# Altium PCB zynq_dev_V1.PcbDoc (part 1 of 2)
Units mil, origin at the board's own origin, x right, y up, seen from the top; angles counter-clockwise.
Board outline 6000 x 4000 mil, 9 copper layers (Component Side, Ground Plane 1 (GND), Inner Layer 1, Inner Layer 2, Power Plane (VCC), Inner Layer 3, Mid-Layer 4, Ground Plane 2 (GND), Solder Side), stack 82.902 mil thick; 303 components, 162 nets, 1398 pads, 550 vias.
Unrouted connection lines stored in the file: 7.
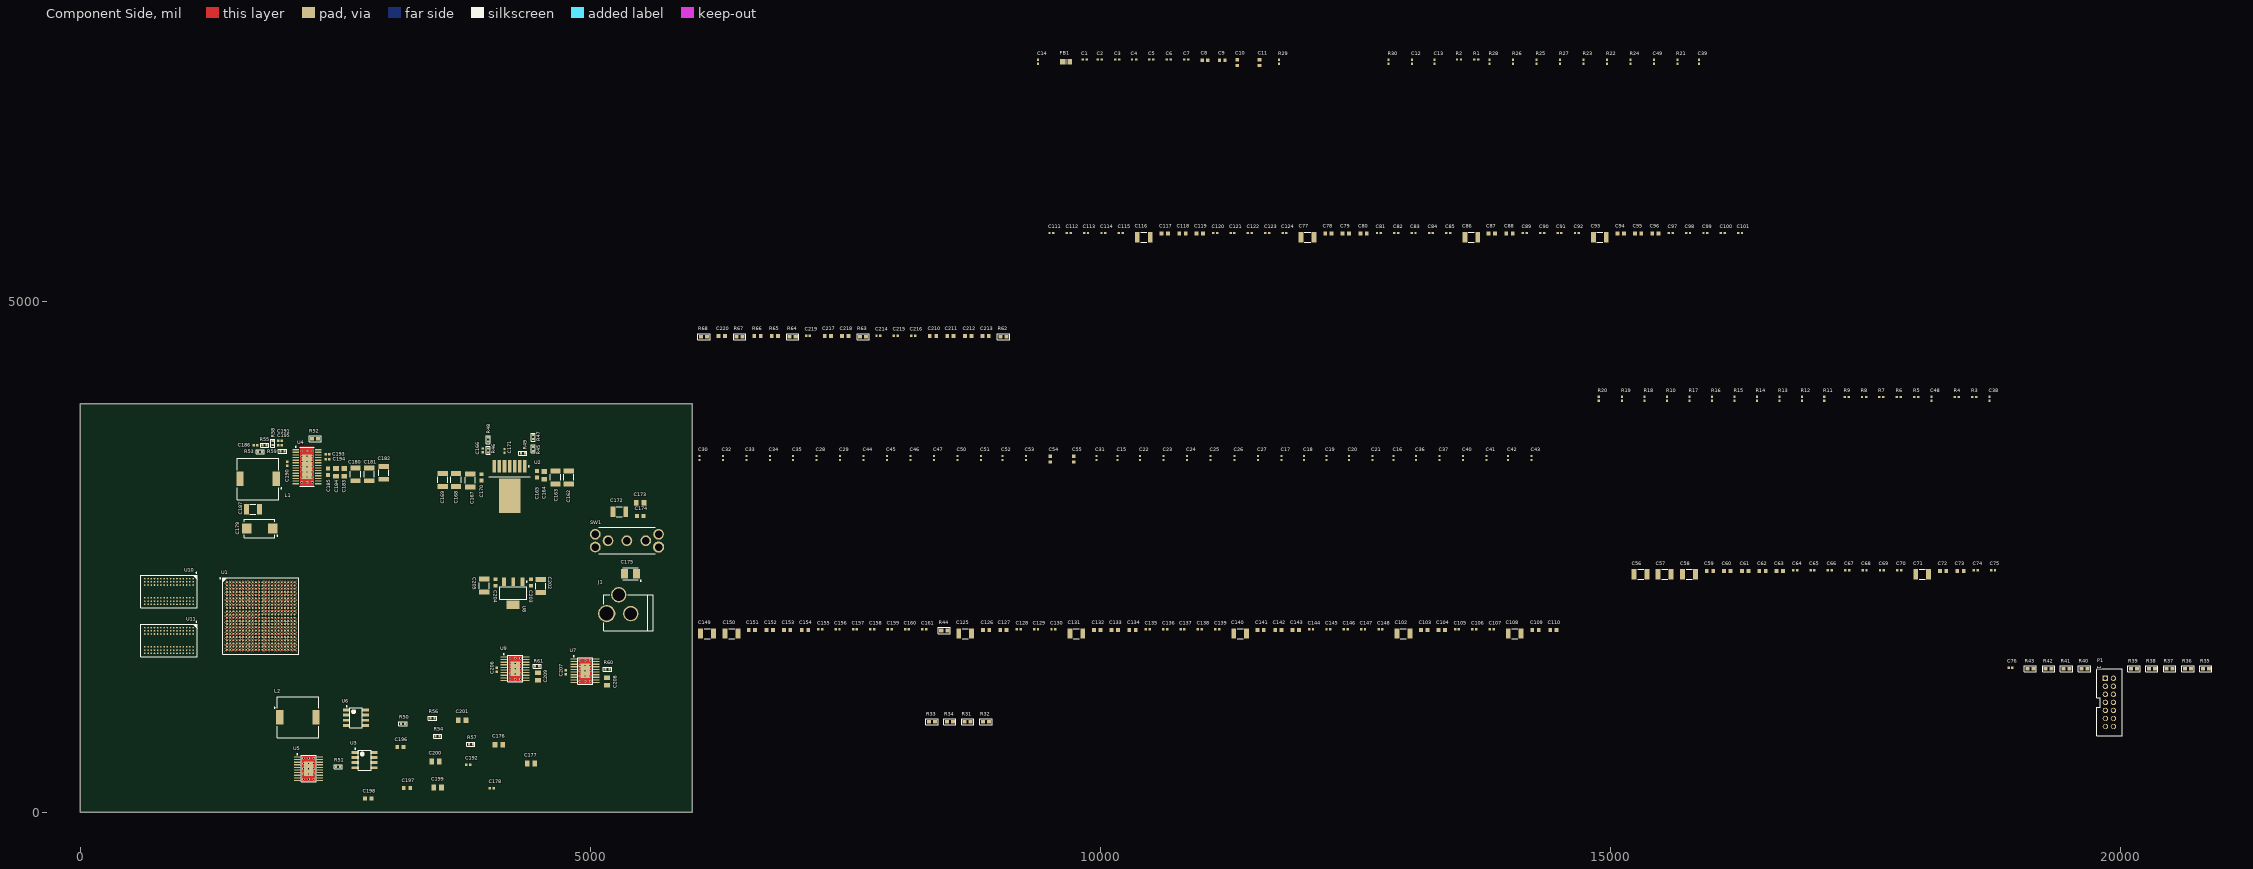
[diagram p0: Component Side view]
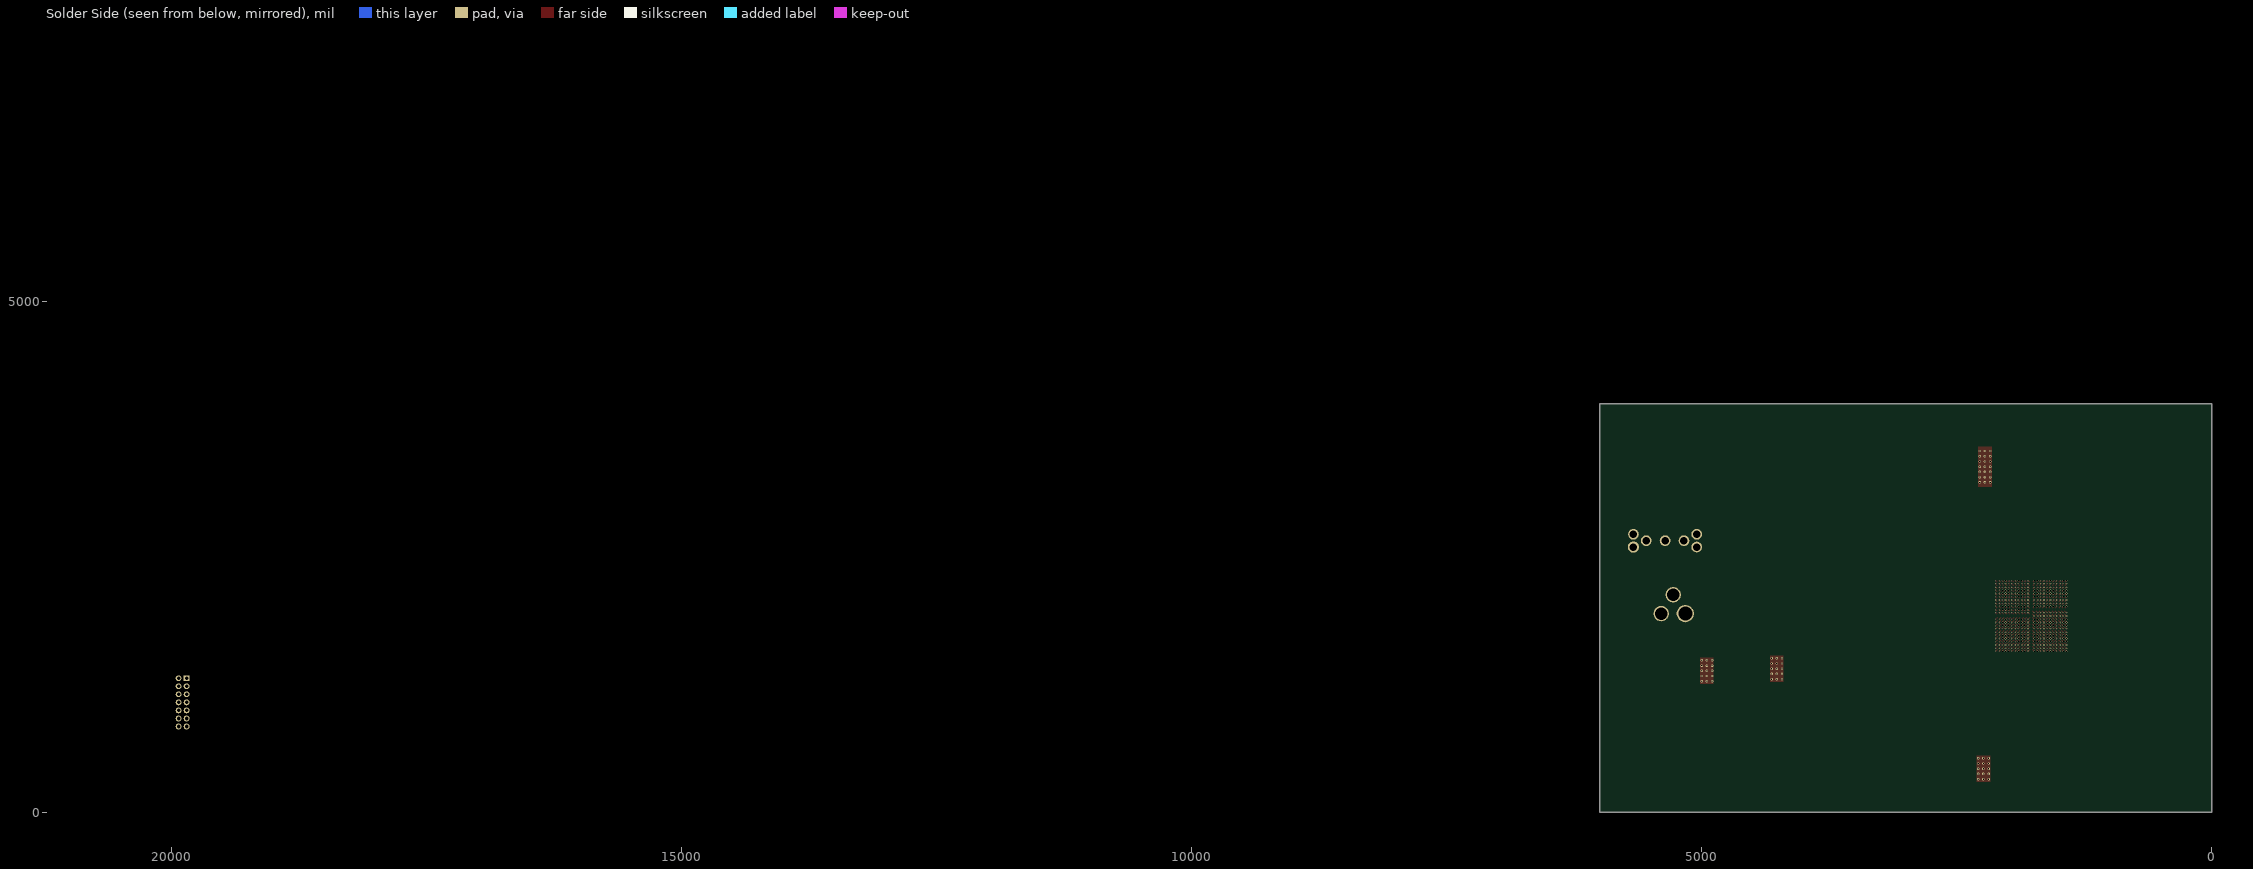
[diagram p1: Solder Side view, seen from below]
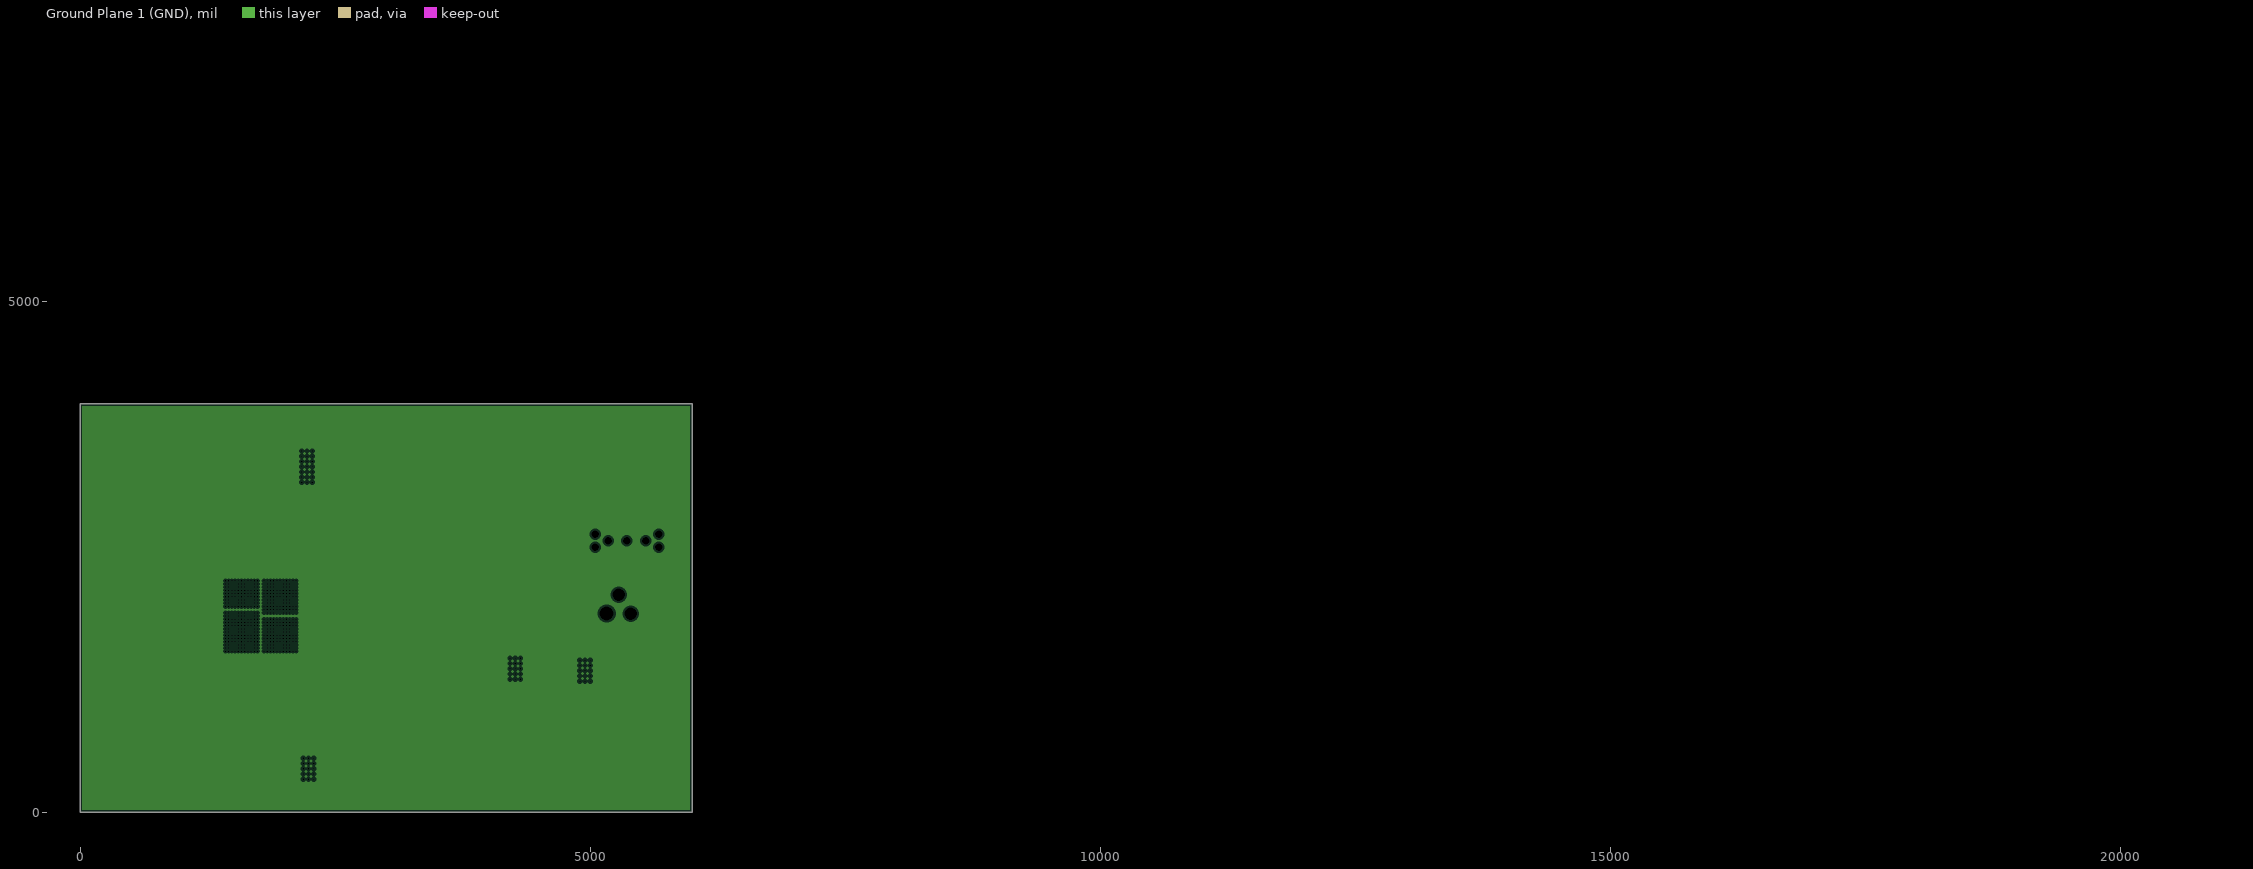
[diagram p2: Ground Plane 1 (GND), clearances drawn from the general rule]
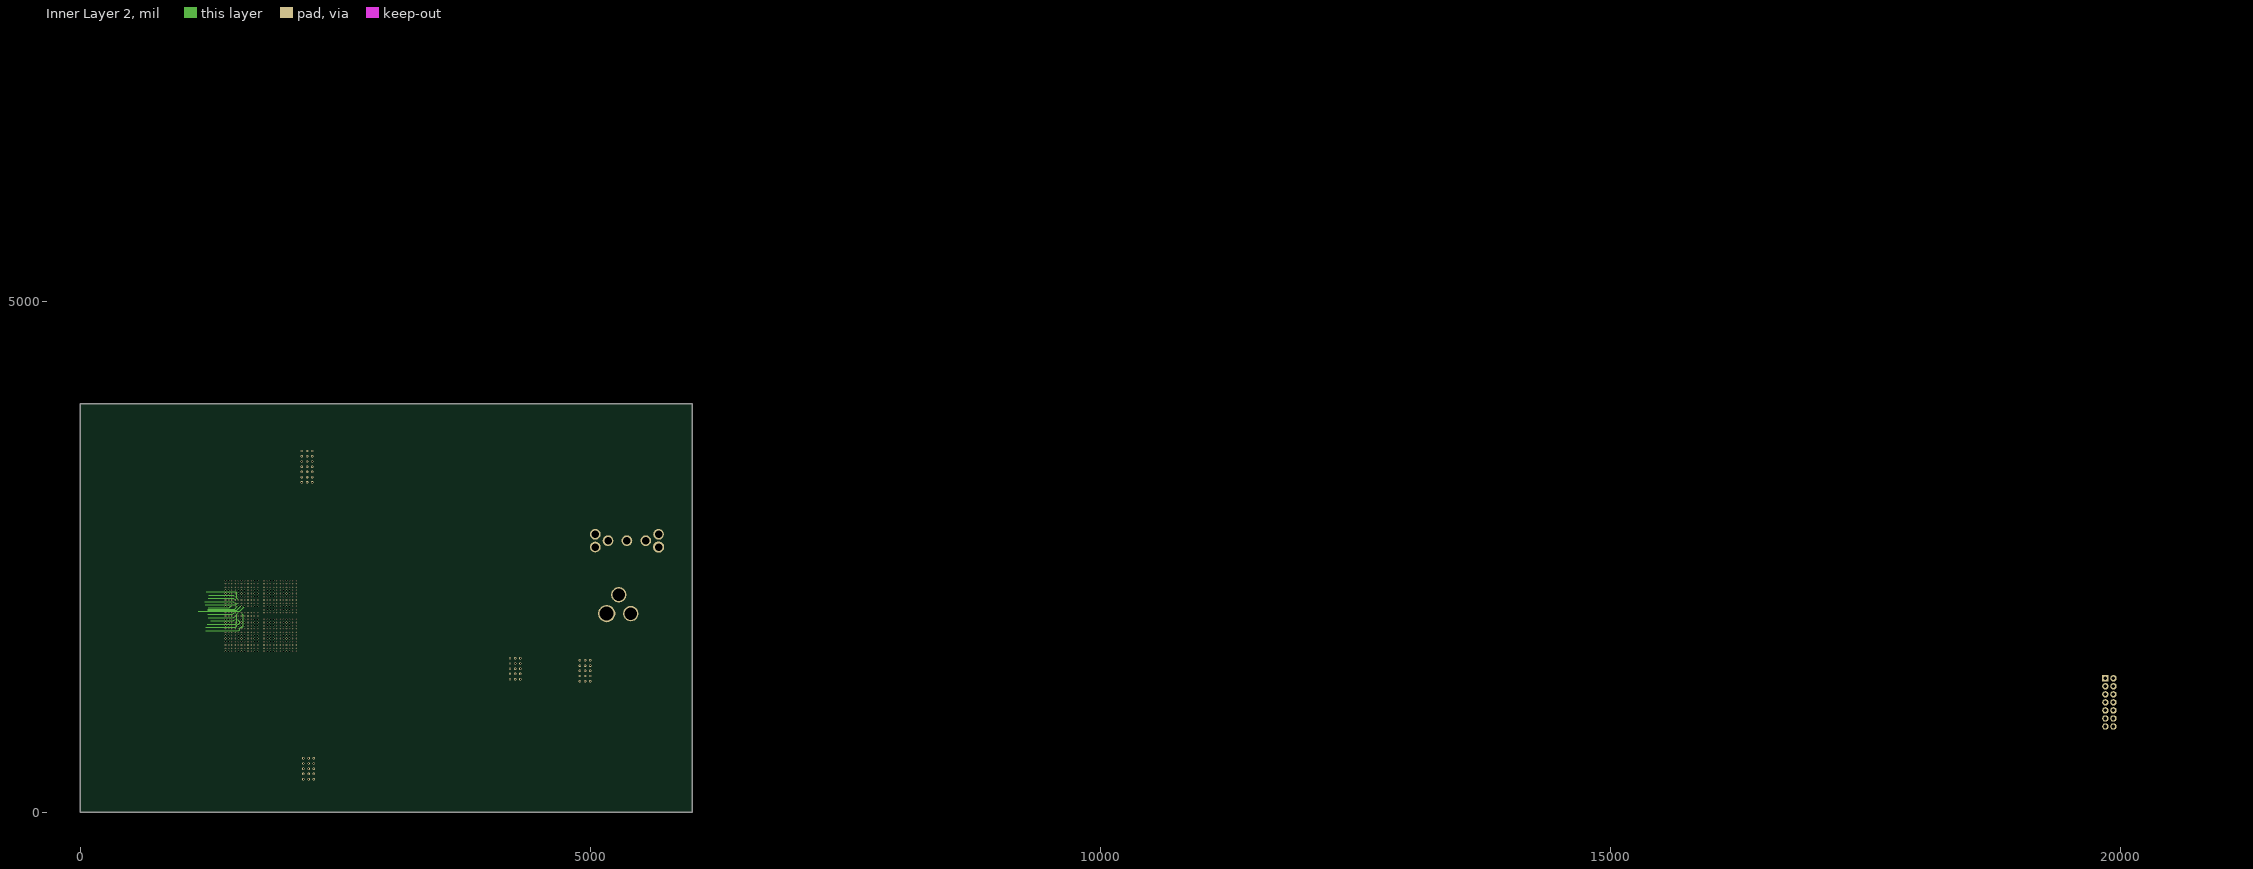
[diagram p3: Inner Layer 2]
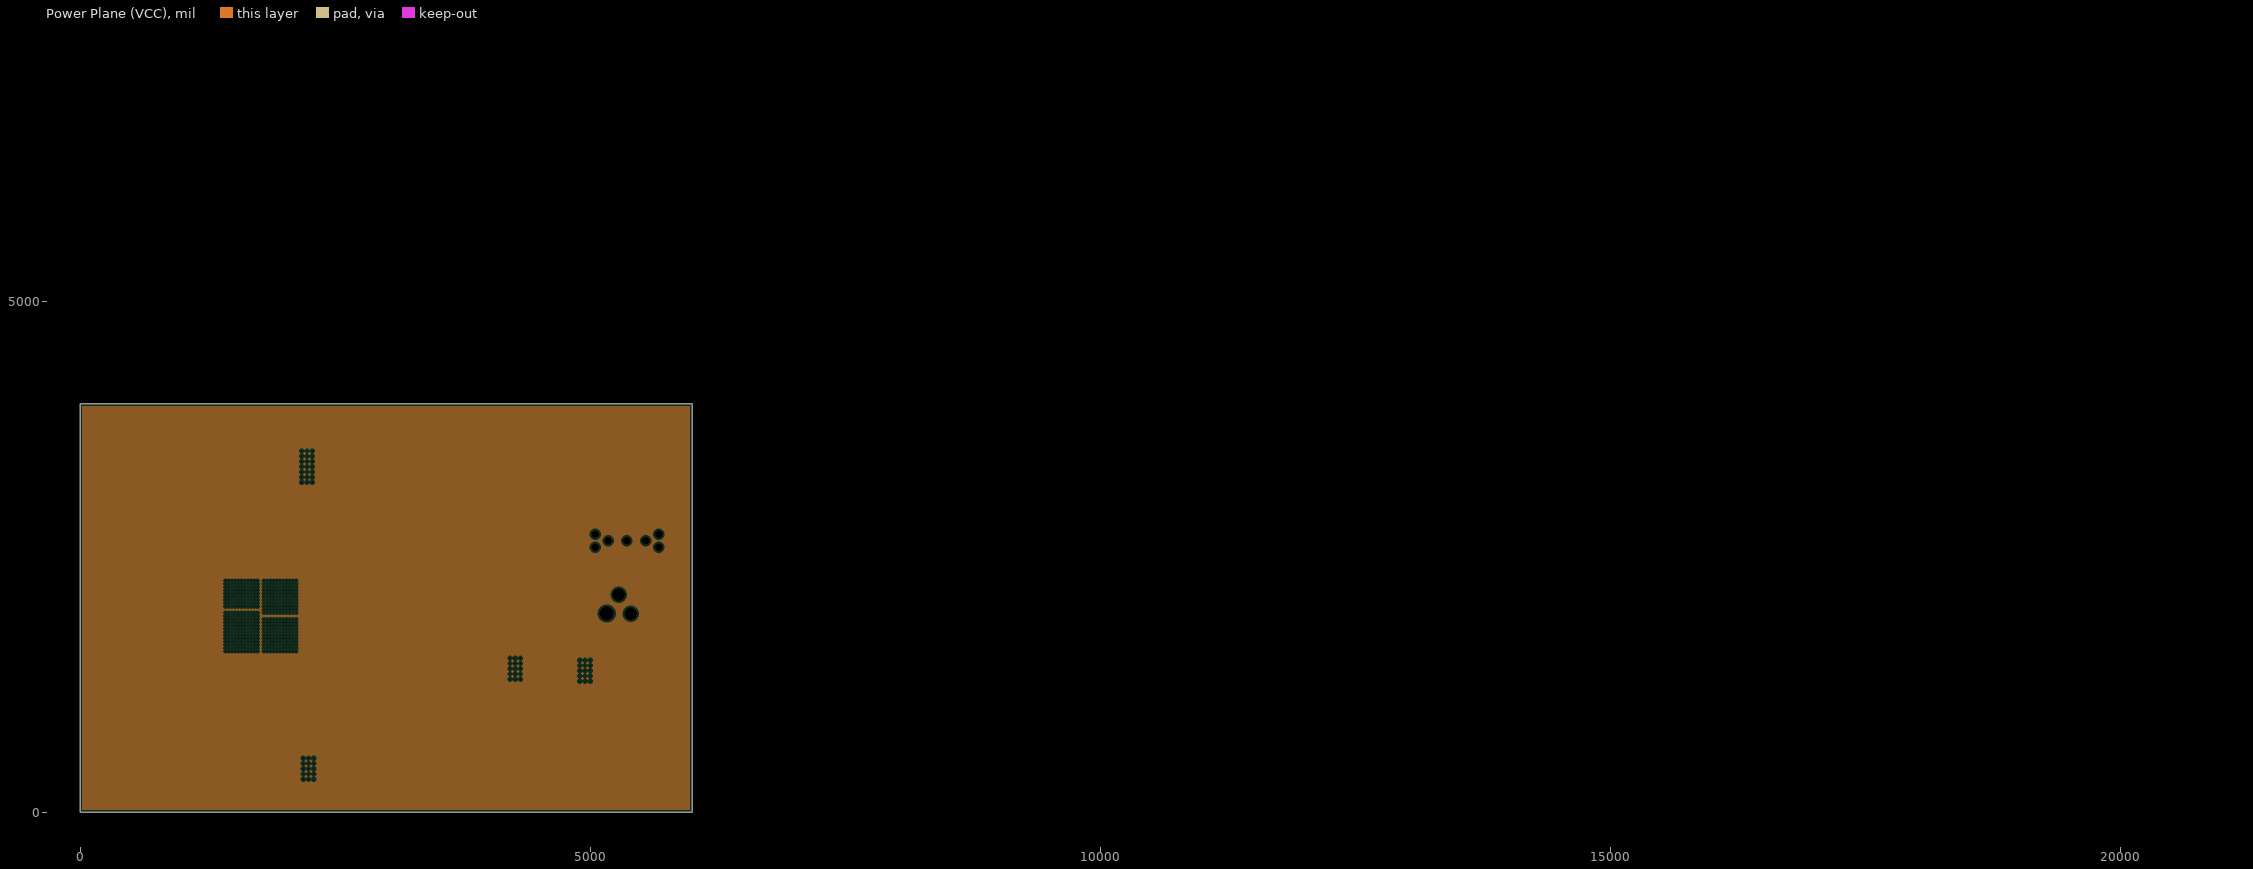
[diagram p4: Power Plane (VCC), clearances drawn from the general rule]
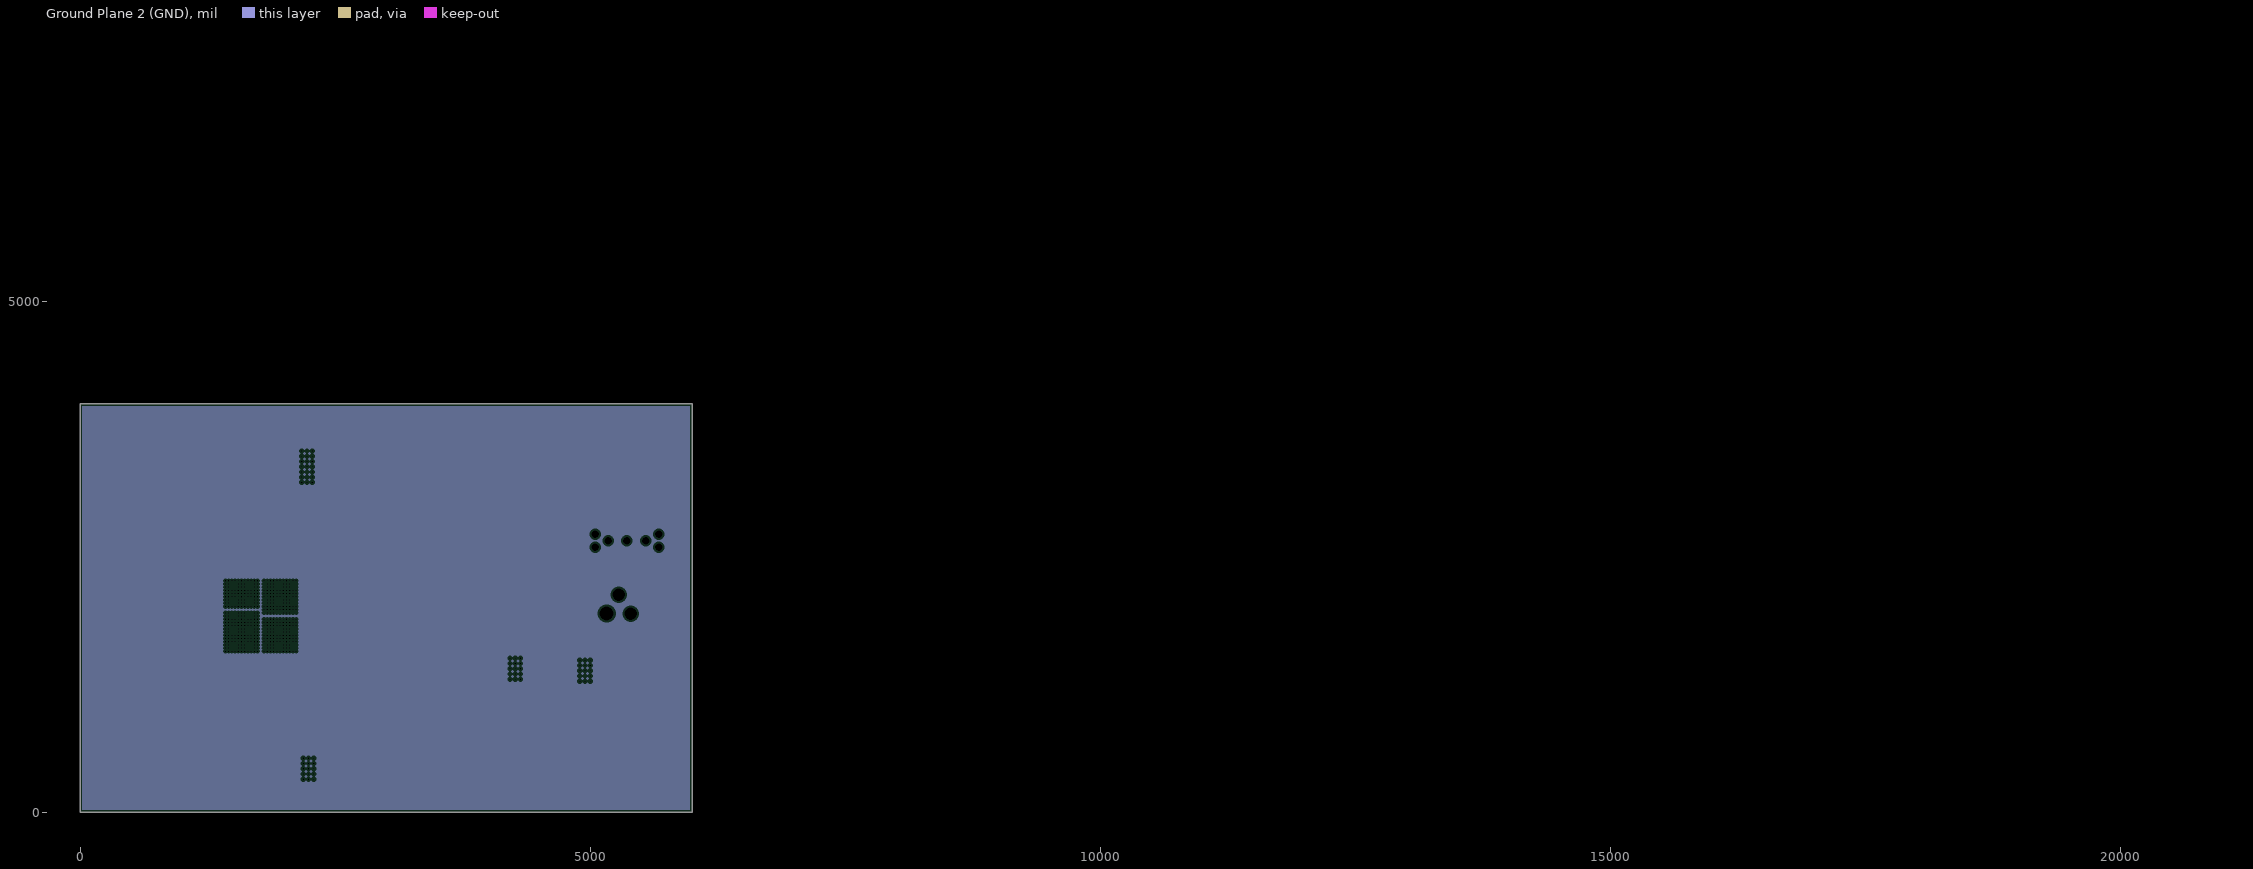
[diagram p5: Ground Plane 2 (GND), clearances drawn from the general rule]

## Layer stack, top to bottom
Top Solder: solder mask 0.4, Solder Resist, Dk 3.5
Component Side: signal copper 1.4
Dielectric 1: core 12.6, FR-4, Dk 4.8
Ground Plane 1 (GND): plane copper 1.417
Dielectric 3: prepreg 5, Dk 4.2
Inner Layer 1: signal copper 1.417
Dielectric 6: core 10, Dk 4.2
Inner Layer 2: signal copper 1.417
Dielectric 5: prepreg 5, Dk 4.2
Power Plane (VCC): plane copper 1.417
Dielectric 4: core 10, Dk 4.2
Inner Layer 3: signal copper 1.417
Dielectric 7: prepreg 5, Dk 4.2
Mid-Layer 4: signal copper 1.4
Dielectric8: dielectric 12.6, FR-4, Dk 4.8
Ground Plane 2 (GND): plane copper 1.417
Dielectric 8: core 10, Dk 4.2
Solder Side: signal copper 1.4
Bottom Solder: solder mask 0.4, Solder Resist, Dk 3.5

## Board outline
0,0 6000,0 6000,4000 0,4000

## Design rules (kind name [scope] priority, off if disabled: settings)
Clearance [All] p1: gap=5
DiffPairsRouting [All] p1: maxlimit=10 minlimit=10 mostfreqgap=10 toplayer_minwidth=15 toplayer_maxwidth=15 toplayer_prefwidth=15 midlayer1_minwidth=15 midlayer1_maxwidth=15 midlayer1_prefwidth=15 midlayer2_minwidth=15 midlayer2_maxwidth=15 midlayer2_prefwidth=15 midlayer3_minwidth=15 midlayer3_maxwidth=15 midlayer3_prefwidth=15 midlayer4_minwidth=15 midlayer4_maxwidth=15 midlayer4_prefwidth=15 bottomlayer_minwidth=15 bottomlayer_maxwidth=15 bottomlayer_prefwidth=15 maxuncoupledlength=500
HoleSize [All] p1: absolutevalues=TRUE maxlimit=100 minlimit=5 maxpercent=80.000 minpercent=20.000
MinimumSolderMaskSliver [All] p1: minsoldermaskwidth=6
PlaneClearance [All] p1: clearance=20
PlaneConnect [All] p1: planeconnectstyle=Relief reliefexpansion=20 reliefentries=4 reliefconductorwidth=10 reliefairgap=10
PolygonConnect [All] p1: connectstyle=Relief reliefconductorwidth=10 reliefentries=4 polygonreliefangle="90 Angle" airgapwidth=10
RoutingVias [All] p1: holewidth=10 width=30 viastyle="Through Hole" minholewidth=5 minwidth=15 maxholewidth=50 maxwidth=50
SilkToSilkClearance [All] p1: silktosilkclearance=6
SilkToSolderMaskClearance SilkscreenOverComponentPads [IsPad] p1: minsilkscreentomaskgap=6 clearancetoexposedcopper=TRUE
SolderMaskExpansion [All] p1: expansion=2.76
Width [All] p1: maxlimit=50 minlimit=5 preferedwidth=5
23 further rules are at their usual default settings.

## Classes and differential pairs
net class DDR3-ADR: DDR3-A0 DDR3-A1 DDR3-A2 DDR3-A3 DDR3-A4 DDR3-A5 DDR3-A6 DDR3-A7 DDR3-A8 DDR3-A9 DDR3-A10 DDR3-A11 DDR3-A12 DDR3-A13 DDR3-A14
component class "[08] - SD_Card and Ethernet": C210 C211 C212 C213 C214 C215 C216 C217 C218 C219 C220 D? H? R62 R63 R64 R65 R66 R67 R68
component class "[07] - ZYNQ IO": U1
component class "[06] - MEMORY": C1 C2 C3 C4 C5 C6 C7 C8 C9 C10 C11 C12 C13 C14 C15 C16 C17 C18 C19 C20 C21 C22 C23 C24 C25 C26 C27 C28 C29 C30 C31 C32 C33 C34 C35 C36 C37 C38 C39 C40 C41 C42 C43 C44 C45 C46 C47 C48 C49 C50 C51 C52 C53 C54 C55 FB1 R1 R2 R3 R4 R5 R6 R7 R8 R9 R10 R11 R12 R13 R14 R15 R16 R17 R18 R19 R20 R21 R22 R23 R24 R25 R26 R27 R28 R29 R30 U10 U11
component class "[05] - POWER REGULATION": C162 C163 C164 C165 C166 C167 C168 C169 C170 C171 C172 C173 C174 C175 C176 C177 C178 C179 C180 C181 C182 C183 C184 C185 C186 C187 C190 C191 C192 C193 C194 C195 C196 C197 C198 C199 C200 C201 C202 C203 C204 C205 C206 C207 C208 C209 J1 L1 L2 L? R45 R46 R47 R48 R49 R50 R51 R52 R53 R54 R55 R56 R57 R58 R59 R60 R61 SW1 SW? U2 U3 U4 U5 U6 U7 U8 U9
component class "[04] - ZYNQ POWER AND JTAG": C56 C57 C58 C59 C60 C61 C62 C63 C64 C65 C66 C67 C68 C69 C70 C71 C72 C73 C74 C75 C76 C77 C78 C79 C80 C81 C82 C83 C84 C85 C86 C87 C88 C89 C90 C91 C92 C93 C94 C95 C96 C97 C98 C99 C100 C101 C102 C103 C104 C105 C106 C107 C108 C109 C110 C111 C112 C113 C114 C115 C116 C117 C118 C119 C120 C121 C122 C123 C124 C125 C126 C127 C128 C129 C130 C131 C132 C133 C134 C135 C136 C137 C138 C139 C140 C141 C142 C143 C144 C145 C146 C147 C148 C149 C150 C151 C152 C153 C154 C155 C156 C157 C158 C159 C160 C161 P1 R31 R32 R33 R34 R35 R36 R37 R38 R39 R40 R41 R42 R43 R44
differential pair DDR3-DQS3: +DDR3-DQS3_P -DDR3-DQS3_N
differential pair DDR3-DQS2: +DDR3-DQS2_P -DDR3-DQS2_N
differential pair DDR3-DQS1: +DDR3-DQS1_P -DDR3-DQS1_N
differential pair DDR3-DQS0: +DDR3-DQS0_P -DDR3-DQS0_N
differential pair DDR3-CLK0: +DDR3-CLK0_P -DDR3-CLK0_N

## Components (designator, comment, footprint, x,y, rotation, side; value= is the part's Value field where it differs from the comment)
C1 "Capacitor" 0402 9845,7375 r0 top
C2 "Capacitor" 0402 9995,7375 r0 top
C3 "Capacitor" 0402 10165,7375 r0 top
C4 "Capacitor" 0402 10330,7375 r0 top
C5 "Capacitor" 0402 10500,7375 r0 top
C6 "Capacitor" 0402 10670,7375 r0 top
C7 "Capacitor" 0402 10840,7375 r0 top
C8 "Capacitor" 1608[0603] 11025,7370 r0 top
C9 "Capacitor" 1608[0603] 11195,7370 r0 top
C10 "Capacitor" 1608[0603] 11340,7345 r90 top
C11 "Capacitor" 1608[0603] 11560,7345 r90 top
C12 "Capacitor" 0402 13055,7355 r90 top
C13 "Capacitor" 0402 13275,7355 r90 top
C14 "Capacitor" 0402 9390,7355 r90 top
C15 "Capacitor" 0402 10170,3470 r90 top
C16 "Capacitor" 0402 12875,3470 r90 top
C17 "Capacitor" 0402 11775,3470 r90 top
C18 "Capacitor" 0402 11995,3470 r90 top
C19 "Capacitor" 0402 12215,3470 r90 top
C20 "Capacitor" 0402 12435,3470 r90 top
C21 "Capacitor" 0402 12665,3470 r90 top
C22 "Capacitor" 0402 10390,3470 r90 top
C23 "Capacitor" 0402 10620,3470 r90 top
C24 "Capacitor" 0402 10850,3470 r90 top
C25 "Capacitor" 0402 11080,3470 r90 top
C26 "Capacitor" 0402 11315,3470 r90 top
C27 "Capacitor" 0402 11545,3470 r90 top
C28 "Capacitor" 0402 7220,3470 r90 top
C29 "Capacitor" 0402 7450,3470 r90 top
C30 "Capacitor" 0402 6070,3470 r90 top
C31 "Capacitor" 0402 9960,3470 r90 top
C32 "Capacitor" 0402 6300,3470 r90 top
C33 "Capacitor" 0402 6530,3470 r90 top
C34 "Capacitor" 0402 6760,3470 r90 top
C35 "Capacitor" 0402 6990,3470 r90 top
C36 "Capacitor" 0402 13095,3470 r90 top
C37 "Capacitor" 0402 13325,3470 r90 top
C38 "Capacitor" 0402 18714.37,4050 r90 top
C39 "Capacitor" 0402 15865,7355 r90 top
C40 "Capacitor" 0402 13555,3470 r90 top
C41 "Capacitor" 0402 13785,3470 r90 top
C42 "Capacitor" 0402 13995,3470 r90 top
C43 "Capacitor" 0402 14225,3470 r90 top
C44 "Capacitor" 0402 7680,3470 r90 top
C45 "Capacitor" 0402 7910,3470 r90 top
C46 "Capacitor" 0402 8140,3470 r90 top
C47 "Capacitor" 0402 8370,3470 r90 top
C48 "Capacitor" 0402 18144.37,4050 r90 top
C49 "Capacitor" 0402 15425,7355 r90 top
C50 "Capacitor" 0402 8600,3470 r90 top
C51 "Capacitor" 0402 8830,3470 r90 top
C52 "Capacitor" 0402 9040,3470 r90 top
C53 "Capacitor" 0402 9270,3470 r90 top
C54 "Capacitor" 1608[0603] 9510,3460 r90 top
C55 "Capacitor" 1608[0603] 9740,3460 r90 top
C56 "GRM32EE70G107ME19L" CAP-1210 15294.37,2330 r0 top
C57 "GRM32EE70G107ME19L" CAP-1210 15529.37,2330 r0 top
C58 "GRM32EE70G107ME19L" CAP-1210 15769.37,2330 r0 top
C59 "GRM188R60J475KE19D" CAP-0603 15974.37,2365 r0 top
C60 "GRM188R60J475KE19D" CAP-0603 16144.37,2365 r0 top
C61 "GRM188R60J475KE19D" CAP-0603 16319.37,2365 r0 top
C62 "GRM188R60J475KE19D" CAP-0603 16489.37,2365 r0 top
C63 "GRM188R60J475KE19D" CAP-0603 16659.37,2365 r0 top
C64 "C1005X7S1A474K050BC" CAP-0402 16809.37,2370 r0 top
C65 "C1005X7S1A474K050BC" CAP-0402 16979.37,2370 r0 top
C66 "C1005X7S1A474K050BC" CAP-0402 17149.37,2370 r0 top
C67 "C1005X7S1A474K050BC" CAP-0402 17319.37,2370 r0 top
C68 "C1005X7S1A474K050BC" CAP-0402 17489.37,2370 r0 top
C69 "C1005X7S1A474K050BC" CAP-0402 17659.37,2370 r0 top
C70 "C1005X7S1A474K050BC" CAP-0402 17829.37,2370 r0 top
C71 "GRM32EE70G107ME19L" CAP-1210 18054.37,2330 r0 top
C72 "GRM188R60J475KE19D" CAP-0603 18259.37,2365 r0 top
C73 "GRM188R60J475KE19D" CAP-0603 18429.37,2365 r0 top
C74 "C1005X7S1A474K050BC" CAP-0402 18579.37,2370 r0 top
C75 "C1005X7S1A474K050BC" CAP-0402 18749.37,2370 r0 top
C76 "C1005X7S1A474K050BC" CAP-0402 18919.37,1415 r0 top
C77 "GRM32EE70G107ME19L" CAP-1210 12030,5635 r0 top
C78 "GRM188R60J475KE19D" CAP-0603 12235,5670 r0 top
C79 "GRM188R60J475KE19D" CAP-0603 12405,5670 r0 top
C80 "GRM188R60J475KE19D" CAP-0603 12580,5670 r0 top
C81 "C1005X7S1A474K050BC" CAP-0402 12730,5675 r0 top
C82 "C1005X7S1A474K050BC" CAP-0402 12900,5675 r0 top
C83 "C1005X7S1A474K050BC" CAP-0402 13070,5675 r0 top
C84 "C1005X7S1A474K050BC" CAP-0402 13240,5675 r0 top
C85 "C1005X7S1A474K050BC" CAP-0402 13410,5675 r0 top
C86 "GRM32EE70G107ME19L" CAP-1210 13635,5635 r0 top
C87 "GRM188R60J475KE19D" CAP-0603 13835,5670 r0 top
C88 "GRM188R60J475KE19D" CAP-0603 14010,5670 r0 top
C89 "C1005X7S1A474K050BC" CAP-0402 14160,5675 r0 top
C90 "C1005X7S1A474K050BC" CAP-0402 14330,5675 r0 top
C91 "C1005X7S1A474K050BC" CAP-0402 14500,5675 r0 top
C92 "C1005X7S1A474K050BC" CAP-0402 14670,5675 r0 top
C93 "GRM32EE70G107ME19L" CAP-1210 14895,5635 r0 top
C94 "GRM188R60J475KE19D" CAP-0603 15100,5670 r0 top
C95 "GRM188R60J475KE19D" CAP-0603 15270,5670 r0 top
C96 "GRM188R60J475KE19D" CAP-0603 15440,5670 r0 top
C97 "C1005X7S1A474K050BC" CAP-0402 15590,5675 r0 top
C98 "C1005X7S1A474K050BC" CAP-0402 15760,5675 r0 top
C99 "C1005X7S1A474K050BC" CAP-0402 15930,5675 r0 top
C100 "C1005X7S1A474K050BC" CAP-0402 16100,5675 r0 top
C101 "C1005X7S1A474K050BC" CAP-0402 16270,5675 r0 top
C102 "GRM32EE70G107ME19L" CAP-1210 12970,1750 r0 top
C103 "GRM188R60J475KE19D" CAP-0603 13175,1785 r0 top
C104 "GRM188R60J475KE19D" CAP-0603 13345,1785 r0 top
C105 "C1005X7S1A474K050BC" CAP-0402 13495,1790 r0 top
C106 "C1005X7S1A474K050BC" CAP-0402 13665,1790 r0 top
C107 "C1005X7S1A474K050BC" CAP-0402 13835,1790 r0 top
C108 "GRM32ER61C476ME15L" CAP-1210 14060,1750 r0 top
C109 "GRM188R60J475KE19D" CAP-0603 14265,1785 r0 top
C110 "GRM188R60J475KE19D" CAP-0603 14440,1785 r0 top
C111 "C1005X7S1A474K050BC" CAP-0402 9520,5675 r0 top
C112 "C1005X7S1A474K050BC" CAP-0402 9690,5675 r0 top
C113 "C1005X7S1A474K050BC" CAP-0402 9860,5675 r0 top
C114 "C1005X7S1A474K050BC" CAP-0402 10030,5675 r0 top
C115 "C1005X7S1A474K050BC" CAP-0402 10200,5675 r0 top
C116 "GRM32EE70G107ME19L" CAP-1210 10425,5635 r0 top
C117 "GRM188R60J475KE19D" CAP-0603 10630,5670 r0 top
C118 "GRM188R60J475KE19D" CAP-0603 10805,5670 r0 top
C119 "GRM188R60J475KE19D" CAP-0603 10975,5670 r0 top
C120 "C1005X7S1A474K050BC" CAP-0402 11125,5675 r0 top
C121 "C1005X7S1A474K050BC" CAP-0402 11295,5675 r0 top
C122 "C1005X7S1A474K050BC" CAP-0402 11465,5675 r0 top
C123 "C1005X7S1A474K050BC" CAP-0402 11635,5675 r0 top
C124 "C1005X7S1A474K050BC" CAP-0402 11805,5675 r0 top
C125 "GRM32EE70G107ME19L" CAP-1210 8675,1750 r0 top
C126 "GRM188R60J475KE19D" CAP-0603 8880,1785 r0 top
C127 "GRM188R60J475KE19D" CAP-0603 9050,1785 r0 top
C128 "C1005X7S1A474K050BC" CAP-0402 9200,1790 r0 top
C129 "C1005X7S1A474K050BC" CAP-0402 9370,1790 r0 top
C130 "C1005X7S1A474K050BC" CAP-0402 9540,1790 r0 top
C131 "GRM32EE70G107ME19L" CAP-1210 9765,1750 r0 top
C132 "GRM188R60J475KE19D" CAP-0603 9970,1785 r0 top
C133 "GRM188R60J475KE19D" CAP-0603 10140,1785 r0 top
C134 "GRM188R60J475KE19D" CAP-0603 10315,1785 r0 top
C135 "C1005X7S1A474K050BC" CAP-0402 10465,1790 r0 top
C136 "C1005X7S1A474K050BC" CAP-0402 10635,1790 r0 top
C137 "C1005X7S1A474K050BC" CAP-0402 10805,1790 r0 top
C138 "C1005X7S1A474K050BC" CAP-0402 10975,1790 r0 top
C139 "C1005X7S1A474K050BC" CAP-0402 11145,1790 r0 top
C140 "GRM32EE70G107ME19L" CAP-1210 11370,1750 r0 top
C141 "GRM188R60J475KE19D" CAP-0603 11570,1785 r0 top
C142 "GRM188R60J475KE19D" CAP-0603 11745,1785 r0 top
C143 "GRM188R60J475KE19D" CAP-0603 11915,1785 r0 top
C144 "C1005X7S1A474K050BC" CAP-0402 12065,1790 r0 top
C145 "C1005X7S1A474K050BC" CAP-0402 12235,1790 r0 top
C146 "C1005X7S1A474K050BC" CAP-0402 12405,1790 r0 top
C147 "C1005X7S1A474K050BC" CAP-0402 12575,1790 r0 top
C148 "C1005X7S1A474K050BC" CAP-0402 12745,1790 r0 top
C149 "GRM32EE70G107ME19L" CAP-1210 6145,1750 r0 top
C150 "GRM32EE70G107ME19L" CAP-1210 6385,1750 r0 top
C151 "GRM188R60J475KE19D" CAP-0603 6585,1785 r0 top
C152 "GRM188R60J475KE19D" CAP-0603 6760,1785 r0 top
C153 "GRM188R60J475KE19D" CAP-0603 6930,1785 r0 top
C154 "GRM188R60J475KE19D" CAP-0603 7105,1785 r0 top
C155 "C1005X7S1A474K050BC" CAP-0402 7255,1790 r0 top
C156 "C1005X7S1A474K050BC" CAP-0402 7425,1790 r0 top
C157 "C1005X7S1A474K050BC" CAP-0402 7595,1790 r0 top
C158 "C1005X7S1A474K050BC" CAP-0402 7765,1790 r0 top
C159 "C1005X7S1A474K050BC" CAP-0402 7935,1790 r0 top
C160 "C1005X7S1A474K050BC" CAP-0402 8105,1790 r0 top
C161 "C1005X7S1A474K050BC" CAP-0402 8275,1790 r0 top
C162 "GRM32ER61C476ME15L" CAP-1210 4790,3280 r270 top
C163 "GRM32ER61C476ME15L" CAP-1210 4660,3280 r270 top
C164 "GRM21BR61E106KA73L" CAP-0805 4550,3300 r270 top
C165 "GRM188R71C105KA12D" CAP-0603 4480,3310 r270 top
C166 "C1005X7R1E223K050BB" CAP-0402 3945,3545 r90 top
C167 "GRM32ER61C476ME15L" CAP-1210 3825,3250 r270 top
C168 "GRM32ER61C476ME15L" CAP-1210 3685,3255 r270 top
C169 "GRM32EE70G107ME19L" CAP-1210 3555,3255 r270 top
C170 "GRM188R71C105KA12D" CAP-0603 3935,3280 r270 top
C171 "C1005X7R1E223K050BB" CAP-0402 4160,3540 r90 top
C172 "GRM32EE70G107ME19L" CAP-1210 5285,2945 r180 top
C173 "GRM21BR61E106KA73L" CAP-0805 5490,3030 r0 top
C174 "GRM188R71C105KA12D" CAP-0603 5490,2900 r0 top
C175 "TAJB226K020RNJ" CAP_POL_1210 5395,2335 r180 top
C176 "GRM21BR61E106KA73L" CAP-0805 4105,660 r0 top
C177 "GRM21BR61E106KA73L" CAP-0805 4420,475 r0 top
C178 "CGA2B1X7R1C104K050BC" CAP-0402 4035,235 r0 top
C179 "T530X337M010ATE004" CAP_POL_2917 1760,2780 r180 top
C180 "GRM32ER61C476ME15L" CAP-1210 2700,3310 r270 top
C181 "GRM32ER61C476ME15L" CAP-1210 2835,3310 r270 top
C182 "GRM32ER61C476ME15L" CAP-1210 2975,3325 r270 top
C183 "GRM21BR61A226ME51L" CAP-0805 2590,3330 r270 top
C184 "GRM21BR61E106KA73L" CAP-0805 2510,3330 r270 top
C185 "GRM188R71C105KA12D" CAP-0603 2430,3335 r270 top
C186 "CGA2B2X7R1H102K050BA" CAP-0402 1720,3595 r0 top
C187 "GRM32ER61C476ME15L" CAP-1210 1695,2970 r0 top
C190 "CGA2B1X7R1E473K050BC" CAP-0402 2030,3415 r90 top
C191 "CGA2B2X8R1H471K050BA" CAP-0402 1960,3640 r0 top
C192 "CGA2B3X7R1H333K050BB" CAP-0402 3805,465 r0 top
C193 "CGA2B1X7R1E473K050BC" CAP-0402 2425,3505 r0 top
C194 "CGA2B1X7R1C104K050BC" CAP-0402 2425,3460 r0 top
C195 "CGA2B2C0G1H680J050BA" CAP-0402 1960,3595 r0 top
C196 "GRM188R60J475KE19D" CAP-0603 3140,640 r0 top
C197 "GRM188R60J475KE19D" CAP-0603 3205,235 r0 top
C198 "GRM188R60J475KE19D" CAP-0603 2825,135 r0 top
C199 "GRM21BR61E106KA73L" CAP-0805 3505,240 r0 top
C200 "GRM21BR61E106KA73L" CAP-0805 3485,495 r0 top
C201 "CGA4J3X7R1C475K125AB" CAP-0805 3745,900 r0 top
C202 "GRM32ER61C476ME15L" CAP-1210 4515,2215 r90 top
C203 "GRM188R71C105KA12D" CAP-0603 4420,2250 r90 top
C204 "GRM188R71C105KA12D" CAP-0603 4070,2250 r90 top
C205 "GRM32ER61C476ME15L" CAP-1210 3960,2220 r90 top
C206 "CGA2B1X7R1C104K050BC" CAP-0402 4085,1395 r90 top
C207 "CGA2B1X7R1C104K050BC" CAP-0402 4760,1370 r90 top
C208 "GRM21BR61E106KA73L" CAP-0805 5165,1280 r270 top
C209 "GRM21BR61E106KA73L" CAP-0805 4490,1330 r270 top
C210 "GRM188R71C104KA01D" CAP-0603 8360,4665 r0 top
C211 "GRM188R71C104KA01D" CAP-0603 8530,4665 r0 top
C212 "GRM188R71A225KE15D" CAP-0603 8705,4665 r0 top
C213 "GRM188R71A225KE15D" CAP-0603 8875,4665 r0 top
C214 "CGA2B1X7R1C104K050BC" CAP-0402 7825,4670 r0 top
C215 "CGA2B1X7R1C104K050BC" CAP-0402 7995,4670 r0 top
C216 "CGA2B1X7R1C104K050BC" CAP-0402 8165,4670 r0 top
C217 "GRM188R71C104KA01D" CAP-0603 7330,4665 r0 top
C218 "GRM188R71C104KA01D" CAP-0603 7500,4665 r0 top
C219 "CGA2B1X7R1C104K050BC" CAP-0402 7135,4670 r0 top
C220 "GRM188R71C104KA01D" CAP-0603 6290,4665 r0 top
FB1 "Ferrite Bead" 6-0805_N 9665,7355 r0 top
J1 "PJ-002BH" PJ-002BH 5280,2130 r0 top
L1 "SRU1048-1R5Y" INDP9898X51N 1745,3265 r180 top
L2 "SRU1048-4R7Y" INDP9898X51N 2135,930 r0 top
P1 "0878311420" 87831-1420 19889.37,1075 r0 top
R1 "Resistor" 0402 13685,7375 r0 top
R2 "Resistor" 0402 13515,7375 r0 top
R3 "Resistor" 0402 18564.37,4070 r0 top
R4 "Resistor" 0402 18394.37,4070 r0 top
R5 "Resistor" 0402 17994.37,4070 r0 top
R6 "Resistor" 0402 17824.37,4070 r0 top
R7 "Resistor" 0402 17654.37,4070 r0 top
R8 "Resistor" 0402 17484.37,4070 r0 top
R9 "Resistor" 0402 17314.37,4070 r0 top
R10 "Resistor" 0402 15554.37,4050 r90 top
R11 "Resistor" 0402 17094.37,4050 r90 top
R12 "Resistor" 0402 16874.37,4050 r90 top
R13 "Resistor" 0402 16654.37,4050 r90 top
R14 "Resistor" 0402 16434.37,4050 r90 top
R15 "Resistor" 0402 16214.37,4050 r90 top
R16 "Resistor" 0402 15994.37,4050 r90 top
R17 "Resistor" 0402 15774.37,4050 r90 top
R18 "Resistor" 0402 15334.37,4050 r90 top
R19 "Resistor" 0402 15114.37,4050 r90 top
R20 "Resistor" 0402 14884.37,4050 r90 top
R21 "Resistor" 0402 15655,7355 r90 top
R22 "Resistor" 0402 14965,7355 r90 top
R23 "Resistor" 0402 14735,7355 r90 top
R24 "Resistor" 0402 15195,7355 r90 top
R25 "Resistor" 0402 14275,7355 r90 top
R26 "Resistor" 0402 14045,7355 r90 top
R27 "Resistor" 0402 14505,7355 r90 top
R28 "Resistor" 0402 13815,7355 r90 top
R29 "Resistor" 0402 11750,7355 r90 top
R30 "Resistor" 0402 12825,7355 r90 top
R31 "ERJ-3EKF4701V" R0603 8699.53,885 r0 top
R32 "ERJ-3EKF4701V" R0603 8879.53,885 r0 top
R33 "ERJ-3EKF4701V" R0603 8349.53,885 r0 top
R34 "ERJ-3EKF4701V" R0603 8524.53,885 r0 top
R35 "RC0603FR-07100RL" R0603 20834.37,1405 r0 top
R36 "RC0603FR-07100RL" R0603 20659.37,1405 r0 top
R37 "RC0603FR-07100RL" R0603 20479.37,1405 r0 top
R38 "RC0603FR-07100RL" R0603 20304.37,1405 r0 top
R39 "ERJ-3EKF4701V" R0603 20129.37,1405 r0 top
R40 "RC0603FR-0710KL" R0603 19644.37,1405 r0 top
R41 "ERJ-3GEY0R00V" R0603 19469.37,1405 r0 top
R42 "RC0603FR-0710KL" R0603 19294.37,1405 r0 top
R43 "RC0603FR-0710KL" R0603 19114.37,1405 r0 top
R44 "ERJ-3GEY0R00V" R0603 8470,1780 r0 top
R45 "ERJ-2RKF3242X" R0402 4440,3560 r270 top
R46 "ERJ-2RKF5621X" R0402 4000,3545 r270 top
R47 "ERJ-2RKF1182X" R0402 4440,3675 r270 top
R48 "ERJ-2RKF1071X" R0402 4000,3650 r270 top
R49 "ERJ-2RKF1003X" R0402 4340,3515 r0 top
R50 "ERJ-2GE0R00X" R0402 3165,865 r0 top
R51 "ERJ-2RKF7502X" R0402 2530,445 r0 top
R52 "ERJ-3EKF4701V" R0603 2305,3660 r0 top
R53 "RC0402FR-0710KL" R0402 1765,3530 r180 top
R54 "ERJ-2GE0R00X" R0402 3505,745 r0 top
R55 "ERA-2AEB1471X" R0402 1810,3595 r180 top
R56 "ERJ-2RKF7502X" R0402 3455,920 r0 top
R57 "CRCW04025K10FKED" R0402 3830,665 r0 top
R58 "ERJ-2RKF2432X" R0402 1890,3615 r90 top
R59 "ERA-2AEB8062X" R0402 1985,3535 r180 top
R60 "ERJ-2RKF2493X" R0402 5170,1400 r0 top
R61 "ERJ-2RKF2493X" R0402 4480,1430 r0 top
R62 "ERJ-3EKF1001V" R0603 9050,4660 r0 top
R63 "ERJ-3EKF4701V" R0603 7675,4660 r0 top
R64 "ERJ-3EKF3300V" R0603 6985,4660 r0 top
R65 "ERJ-3EKF4990V" CAP-0603 6810,4665 r0 top
R66 "ERJ-3EKF4990V" CAP-0603 6640,4665 r0 top
R67 "ERJ-3EKF3300V" R0603 6465,4660 r0 top
R68 "ERJ-3EKF4701V" R0603 6115,4660 r0 top
SW1 "7101J1V3QE2" SPDT 5360,2660 r270 top
U1 "XC7Z020-1CLG484I" CLG484 1771.65,1921.26 r0 top
U2 "LMZ12002TZ-ADJ/NOPB" TZA07A_V 4210,3190 r270 top
U3 "IRF7832TRPBF" SOIC127P600X175-8N 2790,510 r0 top
U4 "TPS54610PWPR" TSOP65P640X120_HS-29N 2225,3385 r0 top
U5 "TPS51116PWPR" TSOP65P640X120_HS-21N 2240,425 r0 top
U6 "IRF7832TRPBF" SOIC127P600X175-8N 2705,925 r0 top
U7 "TPS76725QPWPREP" TSOP65P640X120_HS-21N 4950,1385 r0 top
U8 "LM3940IMPX-3.3/NOPB" SOT230P700X180-4N 4245,2145 r270 top
U9 "TPS76718QPWPR" TSOP65P640X120_HS-21N 4265,1405 r0 top
U10 "MT41J128M16JT-125:K TR" MICT-JT-96 871.65,2162.26 r270 top
U11 "MT41J128M16JT-125:K TR" MICT-JT-96 871.65,1682.26 r270 top

## Footprints (in the part's own frame and the unit in brackets; to place one, negate y for a bottom-side part, rotate by r counter-clockwise, add the part's x,y. Pads: shape width x height; smd on the part's side, far side on the other; paste and mask are expansions set on the pad)
6-0805_N [mm] "Chip Resistor, Body 2.0x1.2mm, IPC Medium Density"
  rect 1.2x1.4 smd: 1(-0.9,0) 2(0.9,0)
  silkscreen extent 0,-0.6 0,0.6, body extent -1.07,-0.7 1.07,0.7, height 0.7
0402 [mm] "Chip Capacitor, Body 1.0x0.5mm, IPC High Density"
  rect 0.6x0.5 smd: 1(-0.5,0) 2(0.5,0)
  body extent -0.55,-0.3 0.55,0.3, height 1.3
1608[0603] [mm] "Chip Capacitor, Body 1.6x0.8mm, IPC High Density"
  rect 0.8x0.9 smd: 1(-0.7,0) 2(0.7,0)
  body extent -0.87,-0.48 0.87,0.48, height 1.3
87831-1420 [mil] "2x7 2mm header (JTAG)"
  rect 53x53 / inner rect 62.99x62.99 / far side rect 56.5x56.5 hole 35 paste+0: 1(-39.37,236.22)
  round 53 / inner round 62.99 / far side round 56.5 hole 35 paste+0: 2(39.37,236.22) 3(-39.37,157.48) 4(39.37,157.48) 5(-39.37,78.74) 6(39.37,78.74) 7(-39.37,0) 8(39.37,0) 9(-39.37,-78.74) 10(39.37,-78.74) 11(-39.37,-157.48) 12(39.37,-157.48) 13(-39.37,-236.22) 14(39.37,-236.22)
  silkscreen extent -124,-328 124,328
CAP-0402 [mm] "Chip Capacitor, 2-Leads, Body 1.00x0.50mm, IPC Medium Density"
  rect 0.6x0.6 smd: 1(-0.475,0) 2(0.475,0)
  body extent -0.53,-0.28 0.53,0.27, height 0.55
CAP-0603 [mm] "Chip Capacitor, 2-Leads, Body 1.60x0.80mm, IPC Medium Density"
  rect 0.95x1 smd: 1(-0.8,0) 2(0.8,0)
  body extent -0.85,-0.45 0.85,0.45, height 0.9
CAP-0805 [mm] "Chip Capacitor, 2-Leads, Body 2.00x1.25mm, IPC Medium Density"
  rect 1.15x1.45 smd: 1(-0.95,0) 2(0.95,0)
  body extent -1.1,-0.72 1.1,0.72, height 1.1
CAP-1210 [mm] "Chip Capacitor, 2-Leads, Body 3.20x2.50mm"
  rect 1.2x2.6 smd: 1(-1.6,0) 2(1.6,0)
  silkscreen extent -0.75,-1.25 0.75,1.25, body extent -1.75,-1.35 1.75,1.35, height 2.7
CAP_POL_1210 [mm] "Molded Capacitor, 2-Leads, Body 3.50x2.85mm, IPC Medium Density"
  rect 1.75x2.3 smd: 1(-1.5,0) 2(1.5,0)
  silkscreen extent -2.68,-1.5 1.9,1.82, body extent -1.85,-1.5 1.85,1.5, height 2.1
CAP_POL_2917 [mm] "Molded Capacitor, 2-Leads, Body 7.30x4.30mm, IPC Medium Density"
  rect 2.37x2.43 smd: 1(-3.25,0) 2(3.25,0)
  silkscreen extent -4.57,-2.3 3.8,2.3, body extent -3.8,-2.3 3.8,2.3, height 4.3
CLG484 [mm] "BGA, 484-Balls, Body 19x19mm, Pitch 0.8mm"
  round 0.45 smd: A1(-8.4,8.4) A2(-7.6,8.4) A3(-6.8,8.4) A4(-6,8.4) A5(-5.2,8.4) A6(-4.4,8.4) A7(-3.6,8.4) A8(-2.8,8.4) A9(-2,8.4) A10(-1.2,8.4) A11(-0.4,8.4) A12(0.4,8.4) A13(1.2,8.4) A14(2,8.4) A15(2.8,8.4) A16(3.6,8.4) A17(4.4,8.4) A18(5.2,8.4) A19(6,8.4) A20(6.8,8.4) A21(7.6,8.4) A22(8.4,8.4) AA1(-8.4,-7.6) AA2(-7.6,-7.6) AA3(-6.8,-7.6) AA4(-6,-7.6) AA5(-5.2,-7.6) AA6(-4.4,-7.6) AA7(-3.6,-7.6) AA8(-2.8,-7.6) AA9(-2,-7.6) AA10(-1.2,-7.6) AA11(-0.4,-7.6) AA12(0.4,-7.6) AA13(1.2,-7.6) AA14(2,-7.6) AA15(2.8,-7.6) AA16(3.6,-7.6) AA17(4.4,-7.6) AA18(5.2,-7.6) AA19(6,-7.6) AA20(6.8,-7.6) AA21(7.6,-7.6) AA22(8.4,-7.6) AB1(-8.4,-8.4) AB2(-7.6,-8.4) AB3(-6.8,-8.4) AB4(-6,-8.4) AB5(-5.2,-8.4) AB6(-4.4,-8.4) AB7(-3.6,-8.4) AB8(-2.8,-8.4) AB9(-2,-8.4) AB10(-1.2,-8.4) AB11(-0.4,-8.4) AB12(0.4,-8.4) AB13(1.2,-8.4) AB14(2,-8.4) AB15(2.8,-8.4) AB16(3.6,-8.4) AB17(4.4,-8.4) AB18(5.2,-8.4) AB19(6,-8.4) AB20(6.8,-8.4) AB21(7.6,-8.4) AB22(8.4,-8.4) B1(-8.4,7.6) B2(-7.6,7.6) B3(-6.8,7.6) B4(-6,7.6) B5(-5.2,7.6) B6(-4.4,7.6) B7(-3.6,7.6) B8(-2.8,7.6) B9(-2,7.6) B10(-1.2,7.6) B11(-0.4,7.6) B12(0.4,7.6) B13(1.2,7.6) B14(2,7.6) B15(2.8,7.6) B16(3.6,7.6) B17(4.4,7.6) B18(5.2,7.6) B19(6,7.6) B20(6.8,7.6) B21(7.6,7.6) B22(8.4,7.6) C1(-8.4,6.8) C2(-7.6,6.8) C3(-6.8,6.8) C4(-6,6.8) C5(-5.2,6.8) C6(-4.4,6.8) C7(-3.6,6.8) C8(-2.8,6.8) C9(-2,6.8) C10(-1.2,6.8) C11(-0.4,6.8) C12(0.4,6.8) C13(1.2,6.8) C14(2,6.8) C15(2.8,6.8) C16(3.6,6.8) C17(4.4,6.8) C18(5.2,6.8) C19(6,6.8) C20(6.8,6.8) C21(7.6,6.8) C22(8.4,6.8) D1(-8.4,6) D2(-7.6,6) D3(-6.8,6) D4(-6,6) D5(-5.2,6) D6(-4.4,6) D7(-3.6,6) D8(-2.8,6) D9(-2,6) D10(-1.2,6) D11(-0.4,6) D12(0.4,6) D13(1.2,6) D14(2,6) D15(2.8,6) D16(3.6,6) D17(4.4,6) D18(5.2,6) D19(6,6) D20(6.8,6) D21(7.6,6) D22(8.4,6) E1(-8.4,5.2) E2(-7.6,5.2) E3(-6.8,5.2) E4(-6,5.2) E5(-5.2,5.2) E6(-4.4,5.2) E7(-3.6,5.2) E8(-2.8,5.2) E9(-2,5.2) E10(-1.2,5.2) E11(-0.4,5.2) E12(0.4,5.2) E13(1.2,5.2) E14(2,5.2) E15(2.8,5.2) E16(3.6,5.2) E17(4.4,5.2) E18(5.2,5.2) E19(6,5.2) E20(6.8,5.2) E21(7.6,5.2) E22(8.4,5.2) F1(-8.4,4.4) F2(-7.6,4.4) F3(-6.8,4.4) F4(-6,4.4) F5(-5.2,4.4) F6(-4.4,4.4) F7(-3.6,4.4) F8(-2.8,4.4) F9(-2,4.4) F10(-1.2,4.4) F11(-0.4,4.4) F12(0.4,4.4) F13(1.2,4.4) F14(2,4.4) F15(2.8,4.4) F16(3.6,4.4) F17(4.4,4.4) F18(5.2,4.4) F19(6,4.4) F20(6.8,4.4) F21(7.6,4.4) F22(8.4,4.4) G1(-8.4,3.6) G2(-7.6,3.6) G3(-6.8,3.6) G4(-6,3.6) G5(-5.2,3.6) G6(-4.4,3.6) G7(-3.6,3.6) G8(-2.8,3.6) G9(-2,3.6) G10(-1.2,3.6) G11(-0.4,3.6) G12(0.4,3.6) G13(1.2,3.6) G14(2,3.6) G15(2.8,3.6) G16(3.6,3.6) G17(4.4,3.6) G18(5.2,3.6) G19(6,3.6) G20(6.8,3.6) G21(7.6,3.6) G22(8.4,3.6) H1(-8.4,2.8) H2(-7.6,2.8) H3(-6.8,2.8) H4(-6,2.8) H5(-5.2,2.8) H6(-4.4,2.8) H7(-3.6,2.8) H8(-2.8,2.8) H9(-2,2.8) H10(-1.2,2.8) H11(-0.4,2.8) H12(0.4,2.8) H13(1.2,2.8) H14(2,2.8) H15(2.8,2.8) H16(3.6,2.8) H17(4.4,2.8) H18(5.2,2.8) H19(6,2.8) H20(6.8,2.8) H21(7.6,2.8) H22(8.4,2.8) J1(-8.4,2) J2(-7.6,2) J3(-6.8,2) J4(-6,2) J5(-5.2,2) J6(-4.4,2) J7(-3.6,2) J8(-2.8,2) J9(-2,2) J10(-1.2,2) J11(-0.4,2) J12(0.4,2) J13(1.2,2) J14(2,2) J15(2.8,2) J16(3.6,2) J17(4.4,2) J18(5.2,2) J19(6,2) J20(6.8,2) J21(7.6,2) J22(8.4,2) K1(-8.4,1.2) K2(-7.6,1.2) K3(-6.8,1.2) K4(-6,1.2) K5(-5.2,1.2) K6(-4.4,1.2) K7(-3.6,1.2) K8(-2.8,1.2) K9(-2,1.2) K10(-1.2,1.2) K11(-0.4,1.2) K12(0.4,1.2) K13(1.2,1.2) K14(2,1.2) K15(2.8,1.2) K16(3.6,1.2) K17(4.4,1.2) K18(5.2,1.2) K19(6,1.2) K20(6.8,1.2) K21(7.6,1.2) K22(8.4,1.2) L1(-8.4,0.4) L2(-7.6,0.4) L3(-6.8,0.4) L4(-6,0.4) L5(-5.2,0.4) L6(-4.4,0.4) L7(-3.6,0.4) L8(-2.8,0.4) L9(-2,0.4) L10(-1.2,0.4) L11(-0.4,0.4) L12(0.4,0.4) L13(1.2,0.4) L14(2,0.4) L15(2.8,0.4) L16(3.6,0.4) L17(4.4,0.4) L18(5.2,0.4) L19(6,0.4) L20(6.8,0.4) L21(7.6,0.4) L22(8.4,0.4) M1(-8.4,-0.4) M2(-7.6,-0.4) M3(-6.8,-0.4) M4(-6,-0.4) M5(-5.2,-0.4) M6(-4.4,-0.4) M7(-3.6,-0.4) M8(-2.8,-0.4) M9(-2,-0.4) M10(-1.2,-0.4) M11(-0.4,-0.4) M12(0.4,-0.4) M13(1.2,-0.4) M14(2,-0.4) M15(2.8,-0.4) M16(3.6,-0.4) M17(4.4,-0.4) M18(5.2,-0.4) M19(6,-0.4) M20(6.8,-0.4) M21(7.6,-0.4) M22(8.4,-0.4) N1(-8.4,-1.2) N2(-7.6,-1.2) N3(-6.8,-1.2) N4(-6,-1.2) N5(-5.2,-1.2) N6(-4.4,-1.2) N7(-3.6,-1.2) N8(-2.8,-1.2) N9(-2,-1.2) N10(-1.2,-1.2) N11(-0.4,-1.2) N12(0.4,-1.2) N13(1.2,-1.2) N14(2,-1.2) N15(2.8,-1.2) N16(3.6,-1.2) N17(4.4,-1.2) N18(5.2,-1.2) N19(6,-1.2) N20(6.8,-1.2) N21(7.6,-1.2) N22(8.4,-1.2) P1(-8.4,-2) P2(-7.6,-2) P3(-6.8,-2) P4(-6,-2) P5(-5.2,-2) P6(-4.4,-2) P7(-3.6,-2) P8(-2.8,-2) P9(-2,-2) P10(-1.2,-2) P11(-0.4,-2) P12(0.4,-2) P13(1.2,-2) P14(2,-2) P15(2.8,-2) P16(3.6,-2) P17(4.4,-2) P18(5.2,-2) P19(6,-2) P20(6.8,-2) P21(7.6,-2) P22(8.4,-2) R1(-8.4,-2.8) R2(-7.6,-2.8) R3(-6.8,-2.8) R4(-6,-2.8) R5(-5.2,-2.8) R6(-4.4,-2.8) R7(-3.6,-2.8) R8(-2.8,-2.8) R9(-2,-2.8) R10(-1.2,-2.8) R11(-0.4,-2.8) R12(0.4,-2.8) R13(1.2,-2.8) R14(2,-2.8) R15(2.8,-2.8) R16(3.6,-2.8) R17(4.4,-2.8) R18(5.2,-2.8) R19(6,-2.8) R20(6.8,-2.8) R21(7.6,-2.8) R22(8.4,-2.8) T1(-8.4,-3.6) T2(-7.6,-3.6) T3(-6.8,-3.6) T4(-6,-3.6) T5(-5.2,-3.6) T6(-4.4,-3.6) T7(-3.6,-3.6) T8(-2.8,-3.6) T9(-2,-3.6) T10(-1.2,-3.6) T11(-0.4,-3.6) T12(0.4,-3.6) T13(1.2,-3.6) T14(2,-3.6) T15(2.8,-3.6) T16(3.6,-3.6) T17(4.4,-3.6) T18(5.2,-3.6) T19(6,-3.6) T20(6.8,-3.6) T21(7.6,-3.6) T22(8.4,-3.6) U1(-8.4,-4.4) U2(-7.6,-4.4) U3(-6.8,-4.4) U4(-6,-4.4) U5(-5.2,-4.4) U6(-4.4,-4.4) U7(-3.6,-4.4) U8(-2.8,-4.4) U9(-2,-4.4) U10(-1.2,-4.4) U11(-0.4,-4.4) U12(0.4,-4.4) U13(1.2,-4.4) U14(2,-4.4) U15(2.8,-4.4) U16(3.6,-4.4) U17(4.4,-4.4) U18(5.2,-4.4) U19(6,-4.4) U20(6.8,-4.4) U21(7.6,-4.4) U22(8.4,-4.4) V1(-8.4,-5.2) V2(-7.6,-5.2) V3(-6.8,-5.2) V4(-6,-5.2) V5(-5.2,-5.2) V6(-4.4,-5.2) V7(-3.6,-5.2) V8(-2.8,-5.2) V9(-2,-5.2) V10(-1.2,-5.2) V11(-0.4,-5.2) V12(0.4,-5.2) V13(1.2,-5.2) V14(2,-5.2) V15(2.8,-5.2) V16(3.6,-5.2) V17(4.4,-5.2) V18(5.2,-5.2) V19(6,-5.2) V20(6.8,-5.2) V21(7.6,-5.2) V22(8.4,-5.2) W1(-8.4,-6) W2(-7.6,-6) W3(-6.8,-6) W4(-6,-6) W5(-5.2,-6) W6(-4.4,-6) W7(-3.6,-6) W8(-2.8,-6) W9(-2,-6) W10(-1.2,-6) W11(-0.4,-6) W12(0.4,-6) W13(1.2,-6) W14(2,-6) W15(2.8,-6) W16(3.6,-6) W17(4.4,-6) W18(5.2,-6) W19(6,-6) W20(6.8,-6) W21(7.6,-6) W22(8.4,-6) Y1(-8.4,-6.8) Y2(-7.6,-6.8) Y3(-6.8,-6.8) Y4(-6,-6.8) Y5(-5.2,-6.8) Y6(-4.4,-6.8) Y7(-3.6,-6.8) Y8(-2.8,-6.8) Y9(-2,-6.8) Y10(-1.2,-6.8) Y11(-0.4,-6.8) Y12(0.4,-6.8) Y13(1.2,-6.8) Y14(2,-6.8) Y15(2.8,-6.8) Y16(3.6,-6.8) Y17(4.4,-6.8) Y18(5.2,-6.8) Y19(6,-6.8) Y20(6.8,-6.8) Y21(7.6,-6.8) Y22(8.4,-6.8)
  silkscreen extent -10.27,-9.5 9.5,9.5, body extent -9.5,-9.5 9.5,9.5, height 1.6
INDP9898X51N [mm] "Precision Wire Wound Inductor, 2-Leads, Body 9.80x9.80mm, IPC Medium Density"
  rect 1.8x3.6 smd: 1(-4.5,0) 2(4.5,0)
  silkscreen extent -5.93,-5.15 5.15,5.15, body extent -5.15,-5.15 5.15,5.15, height 5.1
MICT-JT-96 [mm] "BGA, 96-Balls, Body 14x8mm, Pitch 0.8mm"
  round 0.4 smd: A1(-3.2,6) A2(-2.4,6) A3(-1.6,6) A7(1.6,6) A8(2.4,6) A9(3.2,6) B1(-3.2,5.2) B2(-2.4,5.2) B3(-1.6,5.2) B7(1.6,5.2) B8(2.4,5.2) B9(3.2,5.2) C1(-3.2,4.4) C2(-2.4,4.4) C3(-1.6,4.4) C7(1.6,4.4) C8(2.4,4.4) C9(3.2,4.4) D1(-3.2,3.6) D2(-2.4,3.6) D3(-1.6,3.6) D7(1.6,3.6) D8(2.4,3.6) D9(3.2,3.6) E1(-3.2,2.8) E2(-2.4,2.8) E3(-1.6,2.8) E7(1.6,2.8) E8(2.4,2.8) E9(3.2,2.8) F1(-3.2,2) F2(-2.4,2) F3(-1.6,2) F7(1.6,2) F8(2.4,2) F9(3.2,2) G1(-3.2,1.2) G2(-2.4,1.2) G3(-1.6,1.2) G7(1.6,1.2) G8(2.4,1.2) G9(3.2,1.2) H1(-3.2,0.4) H2(-2.4,0.4) H3(-1.6,0.4) H7(1.6,0.4) H8(2.4,0.4) H9(3.2,0.4) J1(-3.2,-0.4) J2(-2.4,-0.4) J3(-1.6,-0.4) J7(1.6,-0.4) J8(2.4,-0.4) J9(3.2,-0.4) K1(-3.2,-1.2) K2(-2.4,-1.2) K3(-1.6,-1.2) K7(1.6,-1.2) K8(2.4,-1.2) K9(3.2,-1.2) L1(-3.2,-2) L2(-2.4,-2) L3(-1.6,-2) L7(1.6,-2) L8(2.4,-2) L9(3.2,-2) M1(-3.2,-2.8) M2(-2.4,-2.8) M3(-1.6,-2.8) M7(1.6,-2.8) M8(2.4,-2.8) M9(3.2,-2.8) N1(-3.2,-3.6) N2(-2.4,-3.6) N3(-1.6,-3.6) N7(1.6,-3.6) N8(2.4,-3.6) N9(3.2,-3.6) P1(-3.2,-4.4) P2(-2.4,-4.4) P3(-1.6,-4.4) P7(1.6,-4.4) P8(2.4,-4.4) P9(3.2,-4.4) R1(-3.2,-5.2) R2(-2.4,-5.2) R3(-1.6,-5.2) R7(1.6,-5.2) R8(2.4,-5.2) R9(3.2,-5.2) T1(-3.2,-6) T2(-2.4,-6) T3(-1.6,-6) T7(1.6,-6) T8(2.4,-6) T9(3.2,-6)
  silkscreen extent -4.77,-7 4,7, body extent -4,-7 4,7, height 0.25
PJ-002BH [mm] "2.5 mm Center Pin, 5.0 A, Right Angle, Through Hole, Dc Power Jack Connector"
  round 4.3 hole 3.5 paste+0: 1(-3,-4.7)
  round 3.81 hole 3.048 paste+0: 2(3,-4.7) 3(0,0)
  silkscreen extent -3.7,-9 8.64,0
R0402 [mm] "Chip Resistor, 2-Leads, Body 1.00x0.50mm, IPC Medium Density"
  rect 0.5x0.6 smd: 1(-0.5,0) 2(0.5,0)
  silkscreen extent -1.02,-0.51 1.02,0.51, body extent -0.53,-0.27 0.53,0.28, height 0.4
R0603 [mm] "Chip Resistor, 2-Leads, Body 1.60x0.80mm, IPC Medium Density"
  rect 1x0.9 smd: 1(-0.75,0) 2(0.75,0)
  silkscreen extent -1.52,-0.76 1.52,0.76, body extent -0.85,-0.45 0.85,0.45, height 0.55
SOIC127P600X175-8N [mm] "SOIC, 8-Leads, Body 4.90x3.90mm, Pitch 1.27mm, IPC Medium Density"
  rect 1.78x0.72 smd: 1(-2.34,1.905) 2(-2.34,0.635) 3(-2.34,-0.635) 4(-2.34,-1.905) 5(2.34,-1.905) 6(2.34,-0.635) 7(2.34,0.635) 8(2.34,1.905)
  silkscreen extent -2.46,-2.5 1.6,2.94, body extent -2,-2.5 2,2.5, height 1.75
SOT230P700X180-4N [mm] "SOT223, 4-Leads, Body 6.50x7.00mm (avg), Pitch 2.30mm, IPC Medium Density"
  rect 2.15x0.95 smd: 1(-2.9,2.3) 2(-2.9,0) 3(-2.9,-2.3)
  rect 2.15x3.25 smd: 4(2.9,0)
  silkscreen extent -3.02,-3.35 1.55,3.45, body extent -1.85,-3.35 1.85,3.35, height 1.8
SPDT [mil] "SPDT Slide Switch 6A"
  round 105 hole 73 paste+0: 0(-62.5,310.04) 0(-62.5,-310.04) 0(62.5,-310.04) 1(0,185.04) 2(0,0) 3(0,-185.04)
  round 110 hole 73 paste+0: 0(62.5,310.04)
  silkscreen extent -130,-278 130,278
TSOP65P640X120_HS-21N [mm] "TSOP, 20-Leads, Body 6.50x4.40mm, Pitch 0.65mm, Thermal Pad 3.70x2.40mm, IPC Medium Density"
  rect 1.6x0.3 smd: 1(-2.8,2.925) 2(-2.8,2.275) 3(-2.8,1.625) 4(-2.8,0.975) 5(-2.8,0.325) 6(-2.8,-0.325) 7(-2.8,-0.975) 8(-2.8,-1.625) 9(-2.8,-2.275) 10(-2.8,-2.925) 11(2.8,-2.925) 12(2.8,-2.275) 13(2.8,-1.625) 14(2.8,-0.975) 15(2.8,-0.325) 16(2.8,0.325) 17(2.8,0.975) 18(2.8,1.625) 19(2.8,2.275) 20(2.8,2.925)
  rect 2.4x3.7 smd: 21(0,0)
  Component Side region: -1.7,-3.3 1.7,-3.3 1.7,3.3 -1.7,3.3
  silkscreen extent -2.92,-3.3 1.85,3.75, body extent -2.25,-3.3 2.25,3.3, height 1.2
TSOP65P640X120_HS-29N [mm] "TSOP, 28-Leads, Body 9.70x4.40mm, Pitch 0.65mm, Thermal Pad 6.17x2.40mm, IPC Medium Density"
  rect 1.6x0.3 smd: 1(-2.8,4.225) 2(-2.8,3.575) 3(-2.8,2.925) 4(-2.8,2.275) 5(-2.8,1.625) 6(-2.8,0.975) 7(-2.8,0.325) 8(-2.8,-0.325) 9(-2.8,-0.975) 10(-2.8,-1.625) 11(-2.8,-2.275) 12(-2.8,-2.925) 13(-2.8,-3.575) 14(-2.8,-4.225) 15(2.8,-4.225) 16(2.8,-3.575) 17(2.8,-2.925) 18(2.8,-2.275) 19(2.8,-1.625) 20(2.8,-0.975) 21(2.8,-0.325) 22(2.8,0.325) 23(2.8,0.975) 24(2.8,1.625) 25(2.8,2.275) 26(2.8,2.925) 27(2.8,3.575) 28(2.8,4.225)
  rect 2.4x6.17 smd: 29(0,0)
  Component Side region: -1.7,-5 1.7,-5 1.7,5 -1.7,5
  silkscreen extent -2.92,-4.9 1.85,5.05, body extent -2.25,-4.9 2.25,4.9, height 1.2
TZA07A_V [mm] "D2-PAK, 8-Leads, Body 9.9x10.2mm, Pitch 1.27mm, Lead Span 13.8mm, NSC Recommended"
  rect 3.06x0.89 smd paste+0: 1(-5.03,3.81) 2(-5.03,2.54) 3(-5.03,1.27) 4(-5.03,0) 5(-5.03,-1.27) 6(-5.03,-2.54) 7(-5.03,-3.81)
  rect 8.54x5.35 smd paste+0: 8(2.28,0)
  silkscreen extent -5.15,-5.2 -2.39,5.2, body extent -2.3,-5.2 7.8,5.2, height 4.67

## Part data
C1 C2 C3 C4 C5 C6 C7 C8 C9 C10 C11 C12 C13 C14 C15 C16 C17 C18 C19 C20 C21 C22 C23 C24 C25 C26 C27 C28 C29 C30 C31 C32 C33 C34 C35 C36 C37 C38 C39 C40 C41 C42 C43 C44 C45 C46 C47 C48 C49 C50 C51 C52 C53 C54 C55: library part "Cap Semi", "Capacitor (Semiconductor SIM Model)"
C56 C57 C58 C71 C77 C86 C93 C102 C116 C125 C131 C140 C149 C150 C169 C172: "CAP CER 100UF 4V X7U 1210"
C59 C60 C61 C62 C63 C72 C73 C78 C79 C80 C87 C88 C94 C95 C96 C103 C104 C109 C110 C117 C118 C119 C126 C127 C132 C133 C134 C141 C142 C143 C151 C152 C153 C154 C196 C197 C198: "CAP CER 4.7UF 6.3V X5R 0603"
C64 C65 C66 C67 C68 C69 C70 C74 C75 C76 C81 C82 C83 C84 C85 C89 C90 C91 C92 C97 C98 C99 C100 C101 C105 C106 C107 C111 C112 C113 C114 C115 C120 C121 C122 C123 C124 C128 C129 C130 C135 C136 C137 C138 C139 C144 C145 C146 C147 C148 C155 C156 C157 C158 C159 C160 C161: "CAP CER 0.47UF 10V X7S 0402"
C108 C162 C163 C167 C168 C180 C181 C182 C187 C202 C205: "CAP CER 47UF 16V X5R 1210"
C164 C173 C176 C177 C184 C199 C200 C208 C209: "CAP CER 10UF 25V X5R 0805"
C165 C170 C174 C185 C203 C204: "CAP CER 1UF 16V X7R 0603"
C166 C171: "CAP CER 0.022UF 25V X7R 0402"
C175: "CAP TANT 22UF 20V 10% 1210"
C178 C194 C206 C207 C214 C215 C216 C219: "CAP CER 0.1UF 16V X7R 0402"
C179: "CAP TANT POLY 330UF 10V 2917"
C183: "CAP CER 22UF 10V X5R 0805"
C186: "CAP CER 1000PF 50V X7R 0402"
C190 C193: "CAP CER 0.047UF 25V X7R 0402"
C191: "CAP CER 470PF 50V X8R 0402"
C192: "CAP CER 0.033UF 50V X7R 0402"
C195: "CAP CER 68PF 50V C0G 0402"
C201: "CAP CER 4.7UF 16V X7R 0805"
C210 C211 C217 C218 C220: "CAP CER 0.1UF 16V X7R 0603"
C212 C213: "CAP CER 2.2UF 10V X7R 0603"
FB1: library part "Inductor Iron", "Magnetic-Core Inductor"
J1: "CONN PWR JACK 2.5X5.5MM HIGH CUR"
L1: "FIXED IND 1.5UH 7A 4.3 MOHM SMD"
L2: "FIXED IND 4.7UH 5.5A 9.5 MOHM"
P1: "CONN HEADER 14POS 2MM VERT GOLD"
R1 R2 R3 R4 R5 R6 R7 R8 R9 R10 R11 R12 R13 R14 R15 R16 R17 R18 R19 R20 R21 R22 R23 R24 R25 R26 R27 R28 R29 R30: library part Res3
R31 R32 R33 R34 R39 R52 R63 R68: "RES SMD 4.7K OHM 1% 1/10W 0603"
R35 R36 R37 R38: "RES SMD 100 OHM 1% 1/10W 0603"
R40 R42 R43: "RES SMD 10K OHM 1% 1/10W 0603"
R41 R44: "RES SMD 0.0OHM JUMPER 1/10W 0603"
R45: "RES SMD 32.4K OHM 1% 1/10W 0402"
R46: "RES SMD 5.62K OHM 1% 1/10W 0402"
R47: "RES SMD 11.8K OHM 1% 1/10W 0402"
R48: "RES SMD 1.07K OHM 1% 1/10W 0402"
R49: "RES SMD 100K OHM 1% 1/10W 0402"
R50 R54: "RES SMD 0.0OHM JUMPER 1/10W 0402"
R51 R56: "RES SMD 75K OHM 1% 1/10W 0402"
R53: "RES SMD 10K OHM 1% 1/16W 0402"
R55: "RES SMD 1.47KOHM 0.1% 1/16W 0402"
R57: "RES SMD 5.1K OHM 1% 1/16W 0402"
R58: "RES SMD 24.3K OHM 1% 1/10W 0402"
R59: "RES SMD 80.6KOHM 0.1% 1/16W 0402"
R60 R61: "RES SMD 249K OHM 1% 1/10W 0402"
R62: "RES SMD 1K OHM 1% 1/10W 0603"
R64 R67: "RES SMD 330 OHM 1% 1/10W 0603"
R65 R66: "RES SMD 499 OHM 1% 1/10W 0603"
SW1: "SWITCH ROCKER SPDT 5A 120V"
U1: "IC SOC CORTEX-A9 ARTIX-7 484BGA"
U2: "IC BUCK SYNC ADJ 2A TO-PMOD-7"
U3 U6: "MOSFET N-CH 30V 20A 8-SOIC"
U4: "IC REG BUCK ADJ 6A SYNC 28HTSSOP"
U5: "IC DDR SYNC BUC CTRL REF20HTSSOP"
U7: "IC REG LDO 2.5V 1A 20HTSSOP"
U8: "IC REG LDO 3.3V 1A SOT223"
U9: "IC REG LDO 1.8V 1A 20HTSSOP"
U10 U11: "IC DDR3 SDRAM 2GBIT 96FBGA"

## Via types
v1: diameter 16, hole 6, Component Side to Solder Side, 484 vias
v2: diameter 23.62, hole 11.81, Component Side to Solder Side, 66 vias

## Nets (pads, with @x,y where several pads share a name; then routed paths per layer and width w, separated by ;. In a path a pad name is that pad's centre, name@x,y a point inside that pad or via, vN(x,y) a via of type N, cw(c..) or ccw(c..) an arc to the next point about the centre after c; other vN are vias at no path point)
DDR0V75: C1.1 C2.1 C3.1 C4.1 C5.1 C6.1 C7.1 C8.1 C9.1 C10.1 C11.1 C196.1 C197.1 C198.1 C199.1 C200.1 R1.2 R3.2 R4.2 R5.2 R6.2 R7.2 R8.2 R9.2 R11.2 R12.2 R13.2 R14.2 R15.2 R16.2 R17.2 R18.2 R19.2 R20.2 R21.2 R22.2 R23.2 R25.2 R26.2 R28.2 U5.2 U5.4
DDR1V5: C1.2 C2.2 C3.2 C4.2 C5.2 C6.2 C7.2 C8.2 C9.2 C10.2 C11.2 C14.2 C15.2 C16.2 C17.2 C18.2 C19.2 C20.2 C21.2 C22.2 C23.2 C24.2 C25.2 C26.2 C27.2 C28.2 C29.2 C30.2 C31.2 C32.2 C33.2 C34.2 C35.2 C36.2 C37.2 C38.2 C39.2 C40.2 C41.2 C42.2 C43.2 C44.2 C45.2 C46.2 C47.2 C50.2 C51.2 C52.2 C53.2 C54.2 C55.2 FB1.1 R27.2 U1.E2 U1.F5 U1.H1 U1.J4 U1.K7 U1.M3 U1.N6 U1.R2 U1.V1 U10.A1 U10.A8 U10.B2 U10.C1 U10.C9 U10.D2 U10.D9 U10.E9 U10.F1 U10.G7 U10.H2 U10.H9 U10.K2 U10.K8 U10.N1 U10.N9 U10.R1 U10.R9 U11.A1 U11.A8 U11.B2 U11.C1 U11.C9 U11.D2 U11.D9 U11.E9 U11.F1 U11.G7 U11.H2 U11.H9 U11.K2 U11.K8 U11.N1 U11.N9 U11.R1 U11.R9 | length 200.4
  Component Side w7: v1(1425.2,1700.79) U1.V1@1440.94,1716.54 ; v1(1425.2,2047.24) U1.H1@1440.94,2031.5 ; v1(1456.69,1795.28) U1.R2@1472.44,1811.02 ; v1(1456.69,2141.73) U1.E2@1472.44,2125.98 ; v1(1488.19,1889.76) U1.M3@1503.94,1905.51 ; v1(1519.69,2015.75) U1.J4@1535.43,2000 ; v1(1551.18,2110.24) U1.F5@1566.93,2094.49 ; v1(1582.68,1858.27) U1.N6@1598.43,1874.02 ; v1(1614.17,1952.76) U1.K7@1629.92,1968.5
DDR3-A0: R3.1 U1.M4 U10.N3 U11.N3 | length 269
  Component Side w7: v1(1519.69,1889.76) U1.M4@1535.43,1905.51
  Inner Layer 2 w5: 1279.53,1874.02 1503.94,1874.02 v1(1519.69,1889.76)